# Altium PCB MIC29302.PcbDoc
Units mm, origin at the board's own origin, x right, y up, seen from the top; angles counter-clockwise.
Board outline 152.4 x 101.6 mm, 2 copper layers (Top Layer, Bottom Layer), stack 0.325 mm thick; 12 components, 35 nets, 40 pads, 5 vias.
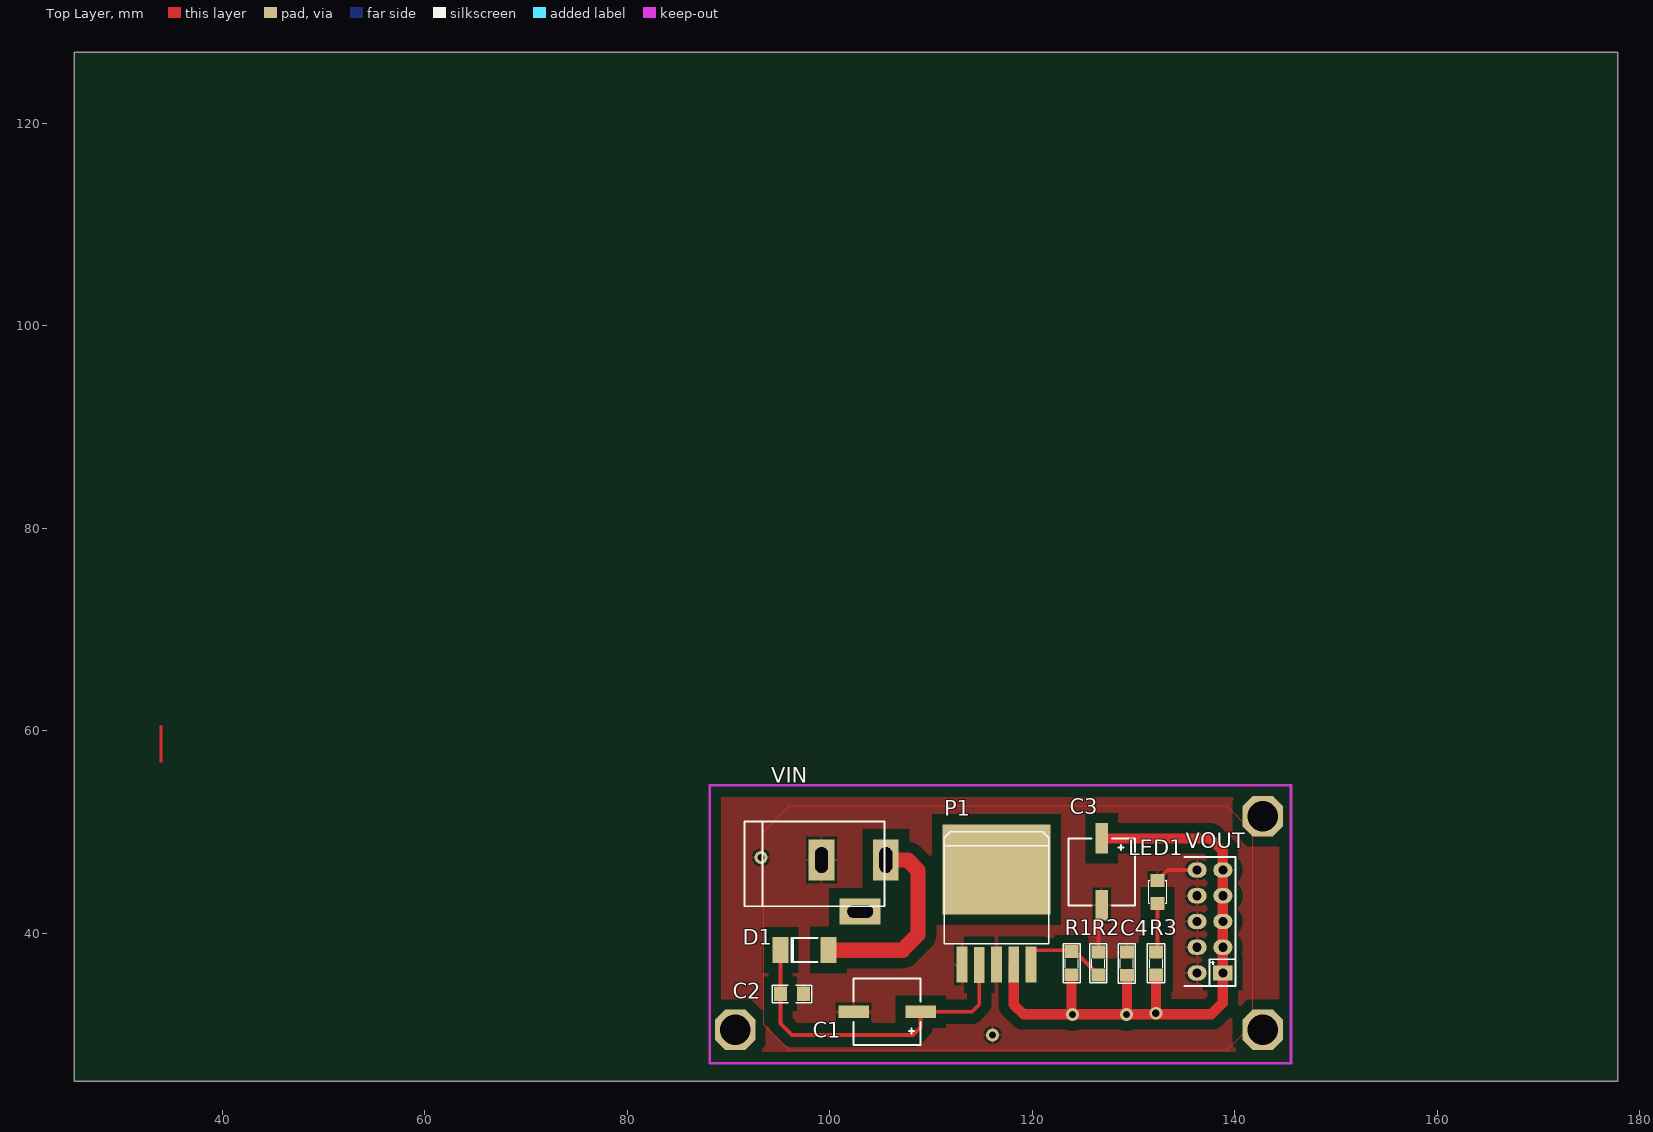
[diagram p0: Top Layer view]
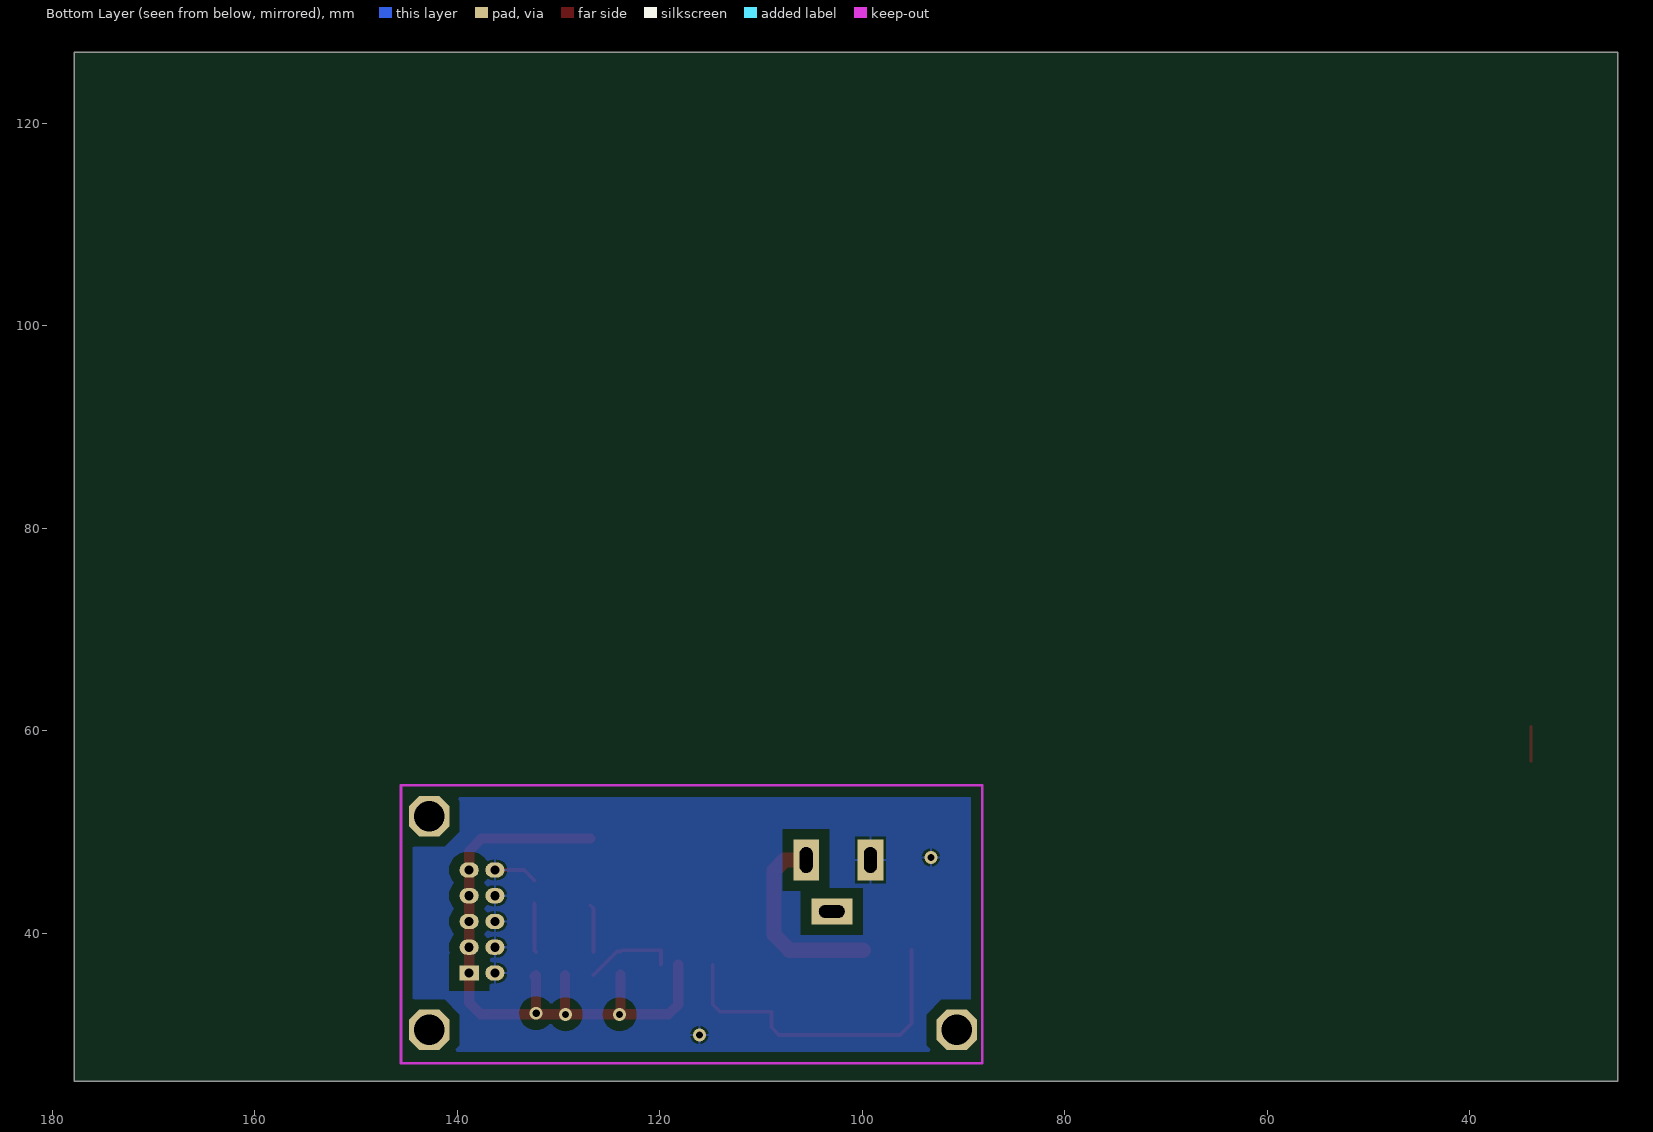
[diagram p1: Bottom Layer view, seen from below]
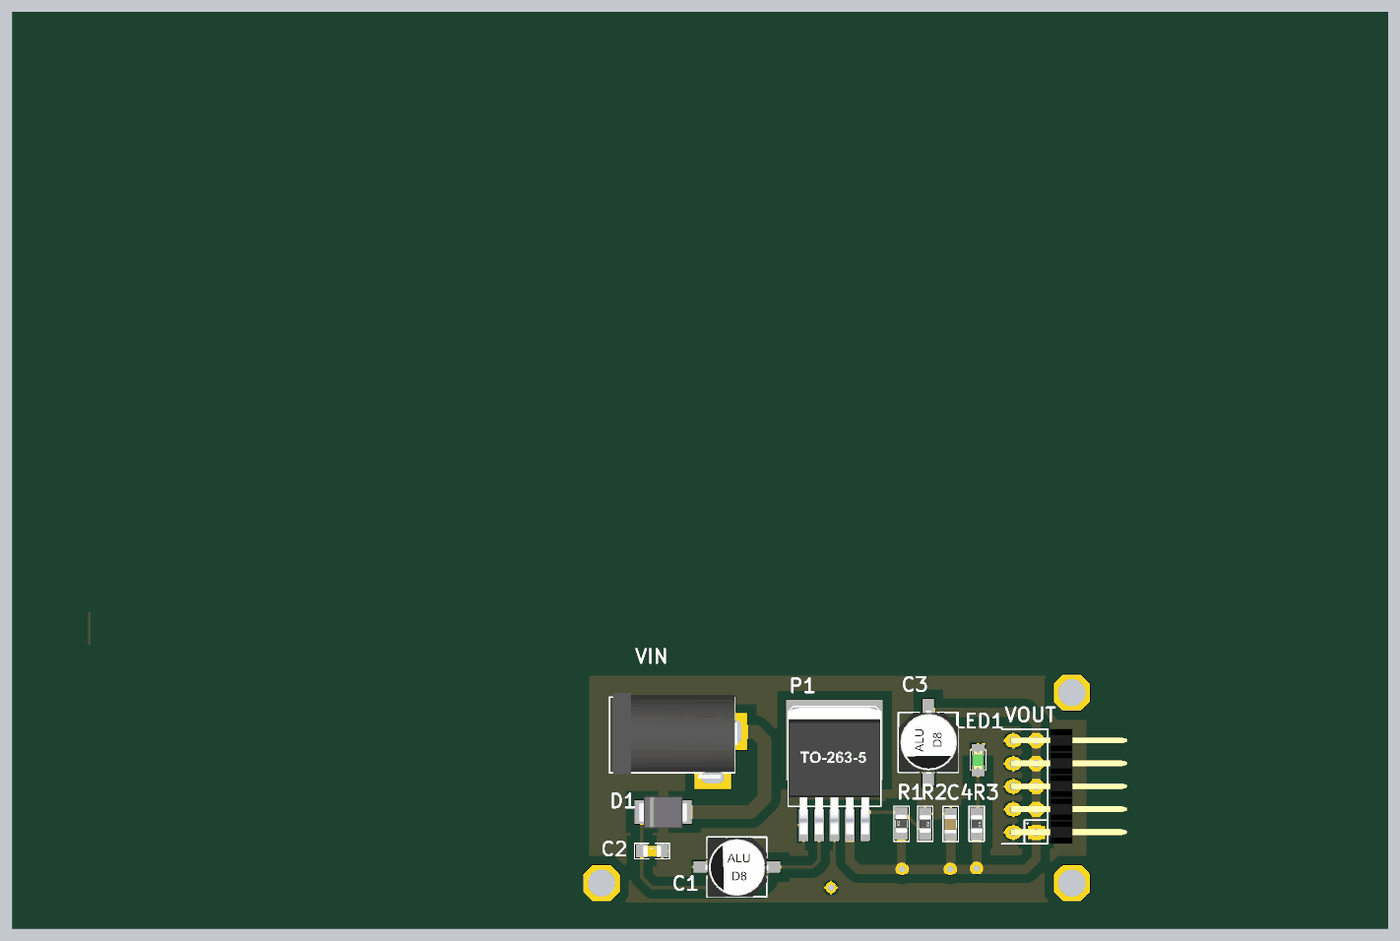
[diagram p2: 3D render of the assembled board from above, using the file's embedded part models]

## Layer stack, top to bottom
Top Layer: signal copper 0.0356
Dielectric 1: core 0.254, FR-4, Dk 4.2
Bottom Layer: signal copper 0.0356

## Board outline
25.4,25.4 177.8,25.4 177.8,127 25.4,127

## Design rules (kind name [scope] priority, off if disabled: settings)
Clearance CIN [All] p1: gap=1.016
Clearance COUT [InNet('OUT')] p2: gap=0.762
Clearance [All] p3: gap=0.508
PolygonConnect [All] p1: connectstyle=Relief reliefconductorwidth=0.254 reliefentries=4 polygonreliefangle="90 Angle" airgapwidth=0.254
RoutingVias [All] p1: holewidth=0.711 width=1.27 viastyle="Through Hole" minholewidth=0.711 minwidth=1.27 maxholewidth=0.711 maxwidth=1.27
SolderMaskExpansion [All] p1: expansion=0.102
UnpouredPolygon [All] p1: allowunpoured=FALSE
Width OUT [InNet('OUT')] p1: maxlimit=1.016 minlimit=1.016 preferedwidth=1.016
Width IN [InNet('IN')] p2: maxlimit=1.524 minlimit=1.524 preferedwidth=1.524
Width [All] p3: maxlimit=0.381 minlimit=0.381 preferedwidth=0.381
29 further rules are at their usual default settings.

## Components (designator, comment, footprint, x,y, rotation, side; value= is the part's Value field where it differs from the comment)
C1 "100uF/450V" CAP-D8-220uF/16V 105.664,32.258 r180 top
C2 "1uF/450V" CAP0805 96.266,34.036 r0 top
C3 "220uF/450V" CAP-D8-220uF/16V 126.848,46.076 r270 top
C4 "103" SM-0805 129.337,37.008 r270 top
D1 "1N5822" DIODE-M7 97.498,38.354 r180 top
LED1 "LED" LED0805-Green 132.359,42.951 r90 top
P1 "MIC29302" LM2576_TO-263 116.459,44.501 r0 top
R1 "100k" RES0805 123.876,35.916 r90 top
R2 "43k" RES0805 126.517,38.176 r270 top
R3 "470" RES0805 132.22,38.176 r270 top
VIN "JP2" DC-IN 102.362,44.704 r0 top
VOUT "Header 5x2" HED2X5_cen 138.811,36.093 r90 top

## Footprints (in the part's own frame and the unit in brackets; to place one, negate y for a bottom-side part, rotate by r counter-clockwise, add the part's x,y. Pads: shape width x height; smd on the part's side, far side on the other; paste and mask are expansions set on the pad)
CAP0805 [mil]
  rect 50x55 smd: 1(-45,0) 2(45,0)
  silkscreen extent -77,-34 76,33, body extent -39,-25 39,25, height 31
CAP-D8-220uF/16V [mm] "6.3 x 7.7 mm"
  rect 3x1.25 smd: 1(-3.302,0) 2(3.302,0)
  silkscreen extent -3.3,-3.3 3.3,3.3, body extent -3.5,-3.25 3.5,3.35, height 7.72
DC-IN [mil] "Jac DC input"
  rect 100x160 hole 50 slot 100 at 90 deg: 1(125,100) 2(-125,100)
  rect 160x100 hole 50 slot 100 at 0 deg: 3(25,-100)
  silkscreen extent -425,-80 120,250, body extent -410,-105 134,269, height 434
DIODE-M7 [mm] "Metal Electrode Face (MELF) Diode; Body 3.5 x 1.5 mm (LxDia)"
  rect 1.55x2.6 smd: 1(-2.375,0) 2(2.375,0)
  silkscreen extent -1.3,-1.2 1.3,1.2, body extent -2.7,-1.77 2.7,1.83, height 2.32
HED2X5_cen [mm] "Connector; Header; 5x2 Position"
  rect 1.5x1.9 hole 0.9: 1(0,0)
  oval 1.5x1.9 hole 0.9: 2(2.54,0) 3(5.08,0) 4(7.62,0) 5(10.16,0) 6(0,2.54) 7(2.54,2.54) 8(5.08,2.54) 9(7.62,2.54) 10(10.16,2.54)
  silkscreen extent -1.27,-1.27 11.43,3.81, body extent -1.24,-10.02 11.46,2.86, height 5.02
LED0805-Green [mil]
  rect 50x55 smd: 1(0,0) 2(90,0)
  silkscreen extent 0,-35 90,35, body extent 5,-25 85,25, height 43
LM2576_TO-263 [mil]
  rect 420x350 smd: 0(0,70.87)
  rect 42x140 smd: 1(-134,-299.13) 2(-67,-299.21) 3(0,-299.13) 4(67,-299.13) 5(134,-299.13)
  silkscreen extent -203,-218 203,218, body extent -200,-339 200,213, height 180
RES0805 [mil]
  rect 50x55 smd: 1(0,0) 2(90,0)
  silkscreen extent -32,-34 121,33, body extent 6,-25 84,25, height 31
SM-0805 [mil] "Compoment SMD 80x50mil"
  rect 50x55 smd: 1(-45,0) 2(45,0)
  silkscreen extent -77,-34 76,33, body extent -40,-27 40,23, height 24

## Part data
C1 C2 C3: library part CP9, "Cap 10000uF/63V"
C4: library part CM, "Cap SMD"
D1: library part D5A, "Diode 5A"
LED1: "LED Single colour Green and Red"
P1: library part LM2576
R1 R2 R3: library part R, "Resistor 1/4W"
VIN: library part Con2, "Connector 2"
VOUT: library part HED5x2

## Free pads (board coordinates)
  oct 4x4 hole 3: 3(90.678,30.48) 3(142.748,30.48) 3(142.748,51.562)

## Via types
v1: diameter 1.27, hole 0.711, Top Layer to Bottom Layer, 5 vias

## Nets (pads, with @x,y where several pads share a name; then routed paths per layer and width w, separated by ;. In a path a pad name is that pad's centre, name@x,y a point inside that pad or via, vN(x,y) a via of type N, cw(c..) or ccw(c..) an arc to the next point about the centre after c; other vN are vias at no path point)
3.3V: 
12VDC: 
24/NEXT/DIR/: 
D4: 
D5: 
D6: 
D7: 
DC+: 
DC-: 
DIR: 
DOWN: 
EN: 
ENCODERA: 
ENCODERB: 
GND: C1.2 C2.2 C3.2 C4.1 LED1.2 P1.1 P1.3 R2.1 VIN.2 VOUT.6 VOUT.7 VOUT.8 VOUT.9 VOUT.10 | length 9.1
  Top Layer w0.381: R2.1 126.517,42.443 C3.2 ; LED1.2 133.375,46.253 VOUT.10
  other v1: 116.078,29.972 93.218,47.498
IN: D1.1 VIN.1 | length 19.4
  Top Layer w1.524: D1.1 107.188,38.354 108.712,39.878 108.712,46.228 107.696,47.244 VIN.1
MODE: 
NetC1_1: C1.1 C2.1 D1.2 P1.2 | length 33.4
  Top Layer w0.381: D1.2 C2.1 95.123,31.115 96.266,29.972 108.204,29.972 108.966,30.734 C1.1 114.046,32.258 114.757,32.969 P1.2
NetIC3_7: 
NetJDC1_1: 
NetLED1_1: LED1.1 R3.1 | length 4.8
  Top Layer w0.381: R3.1 132.359,38.316 LED1.1
NetLED1_2: 
NetLED2_2: 
NetP1_5: P1.5 R1.2 R2.2 | length 9.1
  Top Layer w0.381: P1.5 119.863,38.329 123.749,38.329 R1.2 124.206,38.202 R2.2
OUT: C3.1 C4.2 P1.4 R1.1 R3.2 VOUT.1 VOUT.2 VOUT.3 VOUT.4 VOUT.5 | length 64.9
  Top Layer w1.016: P1.4 118.161,32.969 119.126,32.004 v1(123.952,32.004) ; R1.1 123.876,32.08 v1(123.952,32.004) ; C3.1 137.566,49.378 138.811,48.133 VOUT.5 VOUT.4 VOUT.3 VOUT.2 VOUT.1 138.811,33.147 137.668,32.004 v1@132.08,32.004 ; C4.2 129.337,32.055 v1(129.286,32.004) ; R3.2@132.334,35.776 R3.2 132.22,32.118 v1(132.194,32.118) v1@132.08,32.004 ; v1(123.952,32.004) v1(129.286,32.004) ; v1(129.286,32.004) v1@132.08,32.004
PWM: 
RS: 
RST: 
SCL: 
SDA: 
SET: 
TEST: 
UP: 
V0: 
VCC: 
pads on no net: P1.0 VIN.3
copper on no net: | length 3.4
  Top Layer w0.254: 33.96,56.998 33.96,60.427

## Polygon pours and split planes (outlines as drawn)
GND on Top Layer "Top Layer-No Net" (solid, remove dead copper, pour order 15): 88.138,54.61 88.138,27.178 145.542,27.178 145.542,54.61
GND on Top Layer "Top Layer-No Net" (solid, remove dead copper, shelved, pour order 4): 96.012,52.578 139.192,52.578 141.732,50.038 141.732,30.988 139.192,28.448 96.012,28.448 93.472,30.988 93.472,50.038 96.012,52.578
GND on Bottom Layer "Top Layer-No Net" (solid, remove dead copper, pour order 17): 88.138,54.61 88.138,27.178 145.542,27.178 145.542,54.61

## Keep-outs
Keep-Out Layer:
  lines w0.254: 88.138,27.178 88.138,54.61 145.542,54.61 145.542,27.178 88.138,27.178